# Altium PCB Battery_Balance_V1_0.PcbDoc
Units mm, origin at the board's own origin, x right, y up, seen from the top; angles counter-clockwise.
Board outline 56.9 x 23.6 mm, 2 copper layers (Top Layer, Bottom Layer), stack 2.21 mm thick; 7 components, 8 nets, 25 pads, 0 vias.
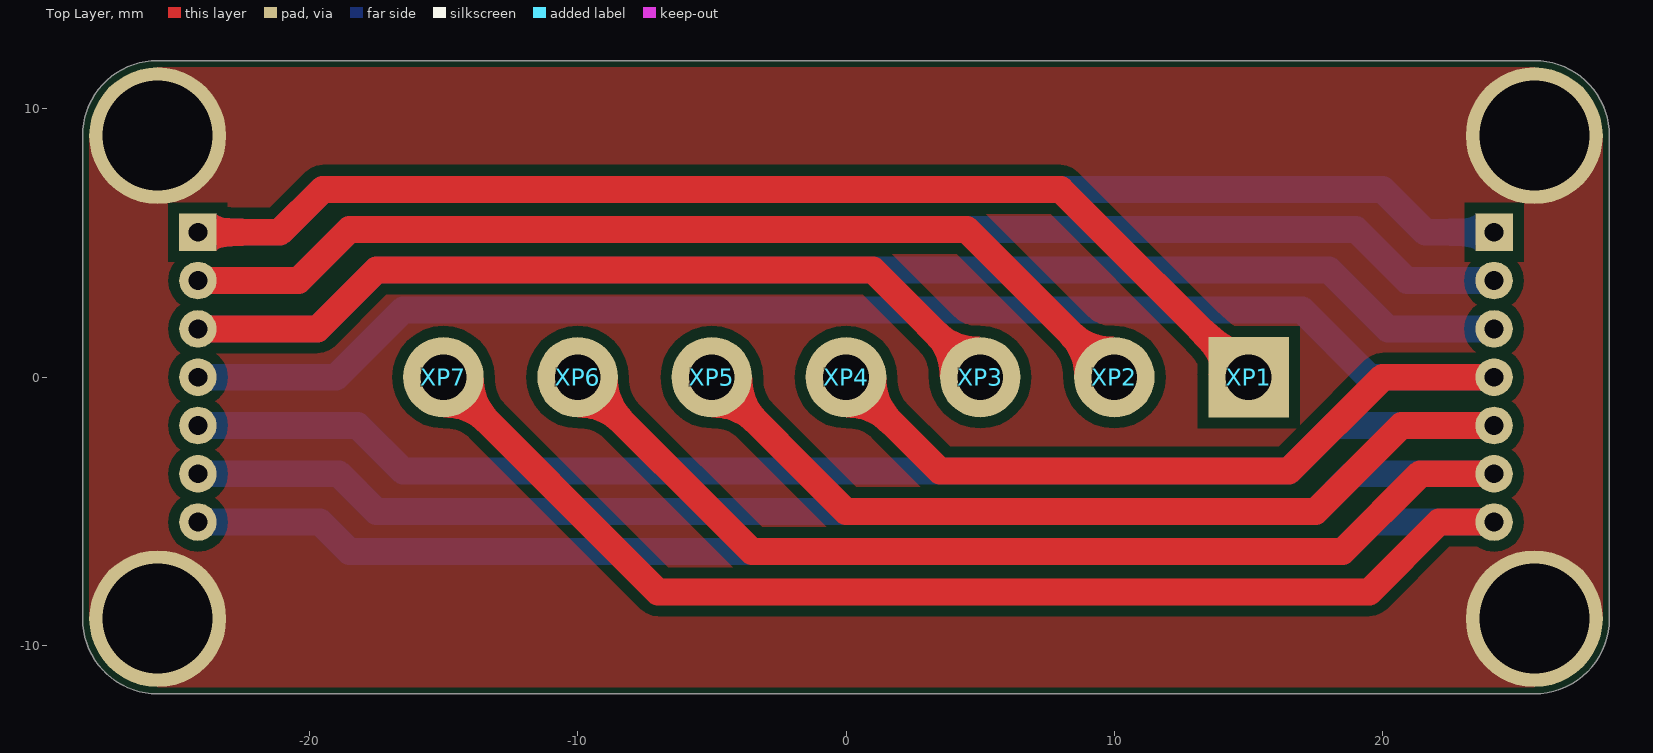
[diagram p0: Top Layer view]
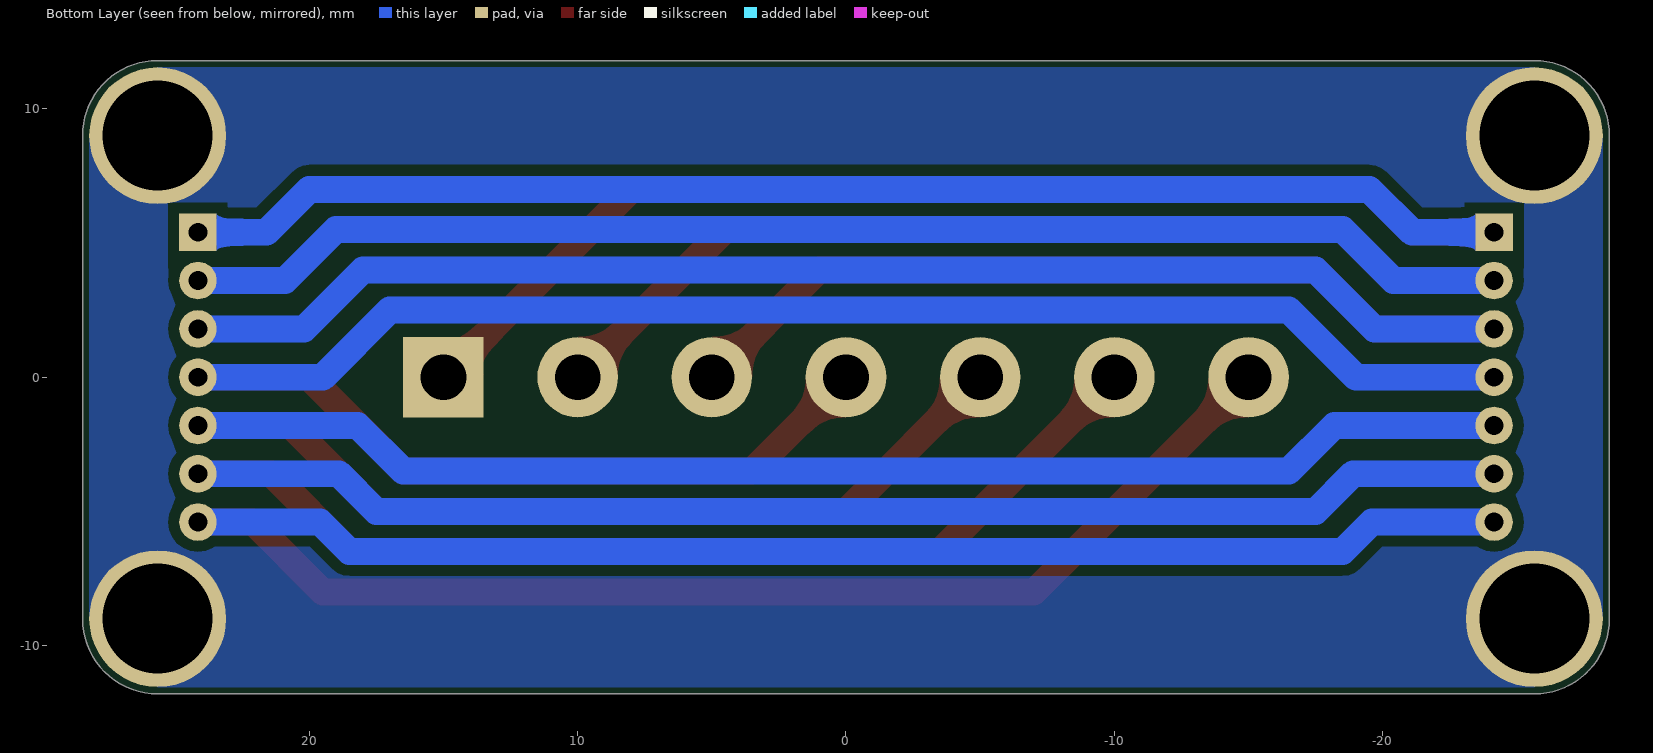
[diagram p1: Bottom Layer view, seen from below]

## Layer stack, top to bottom
Top Solder: solder mask 0.0102, Solder Resist, Dk 3.5
Top Layer: signal copper 0.105
Dielectric 1: core 2, FR4, Dk 4.6
Bottom Layer: signal copper 0.105
Bottom Solder: solder mask 0.0102, Solder Resist, Dk 3.5

## Board outline
-25.65,-11.8 cw(c-25.65,-9) -28.45,-9 -28.45,9 cw(c-25.65,9) -25.65,11.8 25.65,11.8 cw(c25.65,9) 28.45,9 28.45,-9 cw(c25.65,-9) 25.65,-11.8

## Design rules (kind name [scope] priority, off if disabled: settings)
Clearance [All] p1: gap=0.4 ignorepadtopadclearanceinfootprint=FALSE except(0.1: Arc-THPad Track-THPad)
PolygonConnect [All] p1: connectstyle=Direct reliefconductorwidth=0.254 reliefentries=4 polygonreliefangle="90 Angle" airgapwidth=0.254
RoomDefinition main [InComponentClass('main')] p1: confinementstyle=ConfineIn formatcopy=TRUE lockcomponents=FALSE outline -29,-13 30,-13 30,13 -29,13
RoutingVias [All] p1: holewidth=0.711 width=1.27 viastyle="Through Hole" minholewidth=0.711 minwidth=1.27 maxholewidth=0.711 maxwidth=1.27
SolderMaskExpansion [All] p1: expansion=0.102 istentingtop=FALSE
Width [All] p1: maxlimit=10 minlimit=0.5 preferedwidth=0.5
30 further rules are at their usual default settings.

## Components (designator, comment, footprint, x,y, rotation, side; value= is the part's Value field where it differs from the comment)
XP1 "POGO A086" POGO_A086#1 15,0 r0 top
XP2 "POGO A086" POGO_A086#2 10,0 r0 top
XP3 "POGO A086" POGO_A086#2 5,0 r0 top
XP4 "POGO A086" POGO_A086#2 0,0 r0 top
XP5 "POGO A086" POGO_A086#2 -5,0 r0 top
XP6 "POGO A086" POGO_A086#2 -10,0 r0 top
XP7 "POGO A086" POGO_A086#2 -15,0 r0 top

## Footprints (in the part's own frame and the unit in brackets; to place one, negate y for a bottom-side part, rotate by r counter-clockwise, add the part's x,y. Pads: shape width x height; smd on the part's side, far side on the other; paste and mask are expansions set on the pad)
POGO_A086#1 [mm]
  rect 3x3 hole 1.7: 1(0,0)
  body extent -1.5,-1.5 1.5,1.5, height 6.5
POGO_A086#2 [mm]
  round 3 hole 1.7: 1(0,0)
  body extent -1.5,-1.5 1.5,1.5, height 6.5

## Part data
XP1 XP2 XP3 XP4 XP5 XP6 XP7: Manufacturer=-, Part Number="POGO A086"

## Free pads (board coordinates)
  round 5.1 hole 4.1: 0(-25.65,-9) 0(-25.65,9) 0(25.65,-9) 0(25.65,9)
  round 1.4 hole 0.7: 0(-24.15,-5.4) 0(-24.15,-3.6) 0(-24.15,-1.8) 0(-24.15,0) 0(-24.15,1.8) 0(-24.15,3.6) 0(24.15,-5.4) 0(24.15,-3.6) 0(24.15,-1.8) 0(24.15,0) 0(24.15,1.8) 0(24.15,3.6)
  rect 1.4x1.4 hole 0.7: 0(-24.15,5.4) 0(24.15,5.4)

## Nets (pads, with @x,y where several pads share a name; then routed paths per layer and width w, separated by ;. In a path a pad name is that pad's centre, name@x,y a point inside that pad or via, vN(x,y) a via of type N, cw(c..) or ccw(c..) an arc to the next point about the centre after c; other vN are vias at no path point)
0: pad.0@25.65,9 pad.0@25.65,-9 pad.0@-25.65,9 pad.0@-25.65,-9
B1: pad.0@24.15,3.6 pad.0@-24.15,3.6 XP2.1 | length 87.1
  Top Layer w1: pad.0@-24.15,3.6 -20.4,3.6 -18.5,5.5 4.5,5.5 XP2.1
  Bottom Layer w1: pad.0@-24.15,3.6 -20.4,3.6 -18.5,5.5 19,5.5 20.9,3.6 pad.0@24.15,3.6
B2: pad.0@24.15,1.8 pad.0@-24.15,1.8 XP3.1 | length 81.8
  Top Layer w1: pad.0@-24.15,1.8 -19.7,1.8 -17.5,4 1,4 XP3.1
  Bottom Layer w1: pad.0@-24.15,1.8 -19.7,1.8 -17.5,4 18,4 20.2,1.8 pad.0@24.15,1.8
B3: pad.0@24.15,0 pad.0@-24.15,0 XP4.1 | length 77.4
  Top Layer w1: XP4.1 3.5,-3.5 16.5,-3.5 20,0 pad.0@24.15,0
  Bottom Layer w1: pad.0@-24.15,0 -19,0 -16.5,2.5 17,2.5 19.5,0 pad.0@24.15,0
B4: pad.0@24.15,-1.8 pad.0@-24.15,-1.8 XP5.1 | length 82.3
  Top Layer w1: XP5.1 0,-5 17.5,-5 20.7,-1.8 pad.0@24.15,-1.8
  Bottom Layer w1: pad.0@-24.15,-1.8 -18.2,-1.8 -16.5,-3.5 16.5,-3.5 18.2,-1.8 pad.0@24.15,-1.8
B5: pad.0@24.15,-3.6 pad.0@-24.15,-3.6 XP6.1 | length 87.5
  Top Layer w1: XP6.1 -3.5,-6.5 18.5,-6.5 21.4,-3.6 pad.0@24.15,-3.6
  Bottom Layer w1: pad.0@-24.15,-3.6 -18.9,-3.6 -17.5,-5 17.5,-5 18.9,-3.6 pad.0@24.15,-3.6
B6: pad.0@24.15,-5.4 pad.0@-24.15,-5.4 XP7.1 | length 92.8
  Top Layer w1: XP7.1 -7,-8 19.5,-8 22.1,-5.4 pad.0@24.15,-5.4
  Bottom Layer w1: pad.0@-24.15,-5.4 -19.6,-5.4 -18.5,-6.5 18.5,-6.5 19.6,-5.4 pad.0@24.15,-5.4
B-: pad.0@24.15,5.4 pad.0@-24.15,5.4 XP1.1 | length 92.3
  Top Layer w1: pad.0@-24.15,5.4 -21.1,5.4 -19.5,7 8,7 XP1.1
  Bottom Layer w1: pad.0@-24.15,5.4 -21.1,5.4 -19.5,7 20,7 21.6,5.4 pad.0@24.15,5.4

## Polygon pours and split planes (outlines as drawn)
0 on Bottom Layer "NONET_L-01_P-001" (solid, remove dead copper, pour order 5): -28.2,9 -25.65,11.55 25.65,11.55 28.2,9 28.2,-9 25.65,-11.55 -25.65,-11.55 -28.2,-9
0 on Top Layer "NONET_L-01_P-001" (solid, remove dead copper, pour order 6): -28.2,9 -25.65,11.55 25.65,11.55 28.2,9 28.2,-9 25.65,-11.55 -25.65,-11.55 -28.2,-9

## Silkscreen, mask and mechanical layers (free items; w line width, h text height)
Top Solder:
  text "-" at -26.42,5.096 h2.5 r90
  text "-" at 27.58,5.096 h2.5 r90
  text "1" at -26.196,3.305 h2.5 r90
  text "1" at 27.804,3.305 h2.5 r90
  text "2" at -26.196,1.267 h2.5 r90
  text "2" at 27.804,1.267 h2.5 r90
  text "3" at -26.21,-0.524 h2.5 r90
  text "3" at 27.79,-0.524 h2.5 r90
  text "4" at -26.199,-2.355 h2.5 r90
  text "4" at 27.801,-2.355 h2.5 r90
  text "5" at -26.224,-4.231 h2.5 r90
  text "5" at 27.776,-4.231 h2.5 r90
  text "6" at -26.21,-6.03 h2.5 r90
  text "6" at 27.79,-6.03 h2.5 r90
  text "B6" at -16.236,-10.79 h2.5
  text "B5" at -11.241,-10.787 h2.5
  text "B4" at -6.232,-10.801 h2.5
  text "B3" at -1.236,-10.79 h2.5
  text "B2" at 3.772,-10.804 h2.5
  text "B1" at 8.919,-10.804 h2.5
  text "B-" at 13.997,-10.801 h2.5
Mechanical 3:
  the board outline again, w0.2
Mechanical 5:
  circle w0.2: c25.65,9 r2.1
  circle w0.2: c-25.65,9 r2.1
  circle w0.2: c10,0 r0.9
  circle w0.2: c25.65,-9 r2.1
  circle w0.2: c-15,0 r0.9
  circle w0.2: c24.15,5.4 r0.5
  circle w0.2: c24.15,3.6 r0.5
  circle w0.2: c24.15,-5.4 r0.5
  circle w0.2: c15,0 r0.9
  circle w0.2: c5,0 r0.9
  circle w0.2: c0,0 r0.9
  circle w0.2: c-10,0 r0.9
  circle w0.2: c-24.15,5.4 r0.5
  circle w0.2: c-24.15,3.6 r0.5
  circle w0.2: c-24.15,-5.4 r0.5
  circle w0.2: c-25.65,-9 r2.1
  circle w0.2: c24.15,1.8 r0.5
  circle w0.2: c24.15,0 r0.5
  circle w0.2: c24.15,-1.8 r0.5
  circle w0.2: c24.15,-3.6 r0.5
  circle w0.2: c-24.15,1.8 r0.5
  circle w0.2: c-24.15,0 r0.5
  circle w0.2: c-24.15,-1.8 r0.5
  circle w0.2: c-24.15,-3.6 r0.5
  circle w0.2: c-5,0 r0.9